# EAGLE board Eboard_Powerboard (EAGLE 9.2.2)
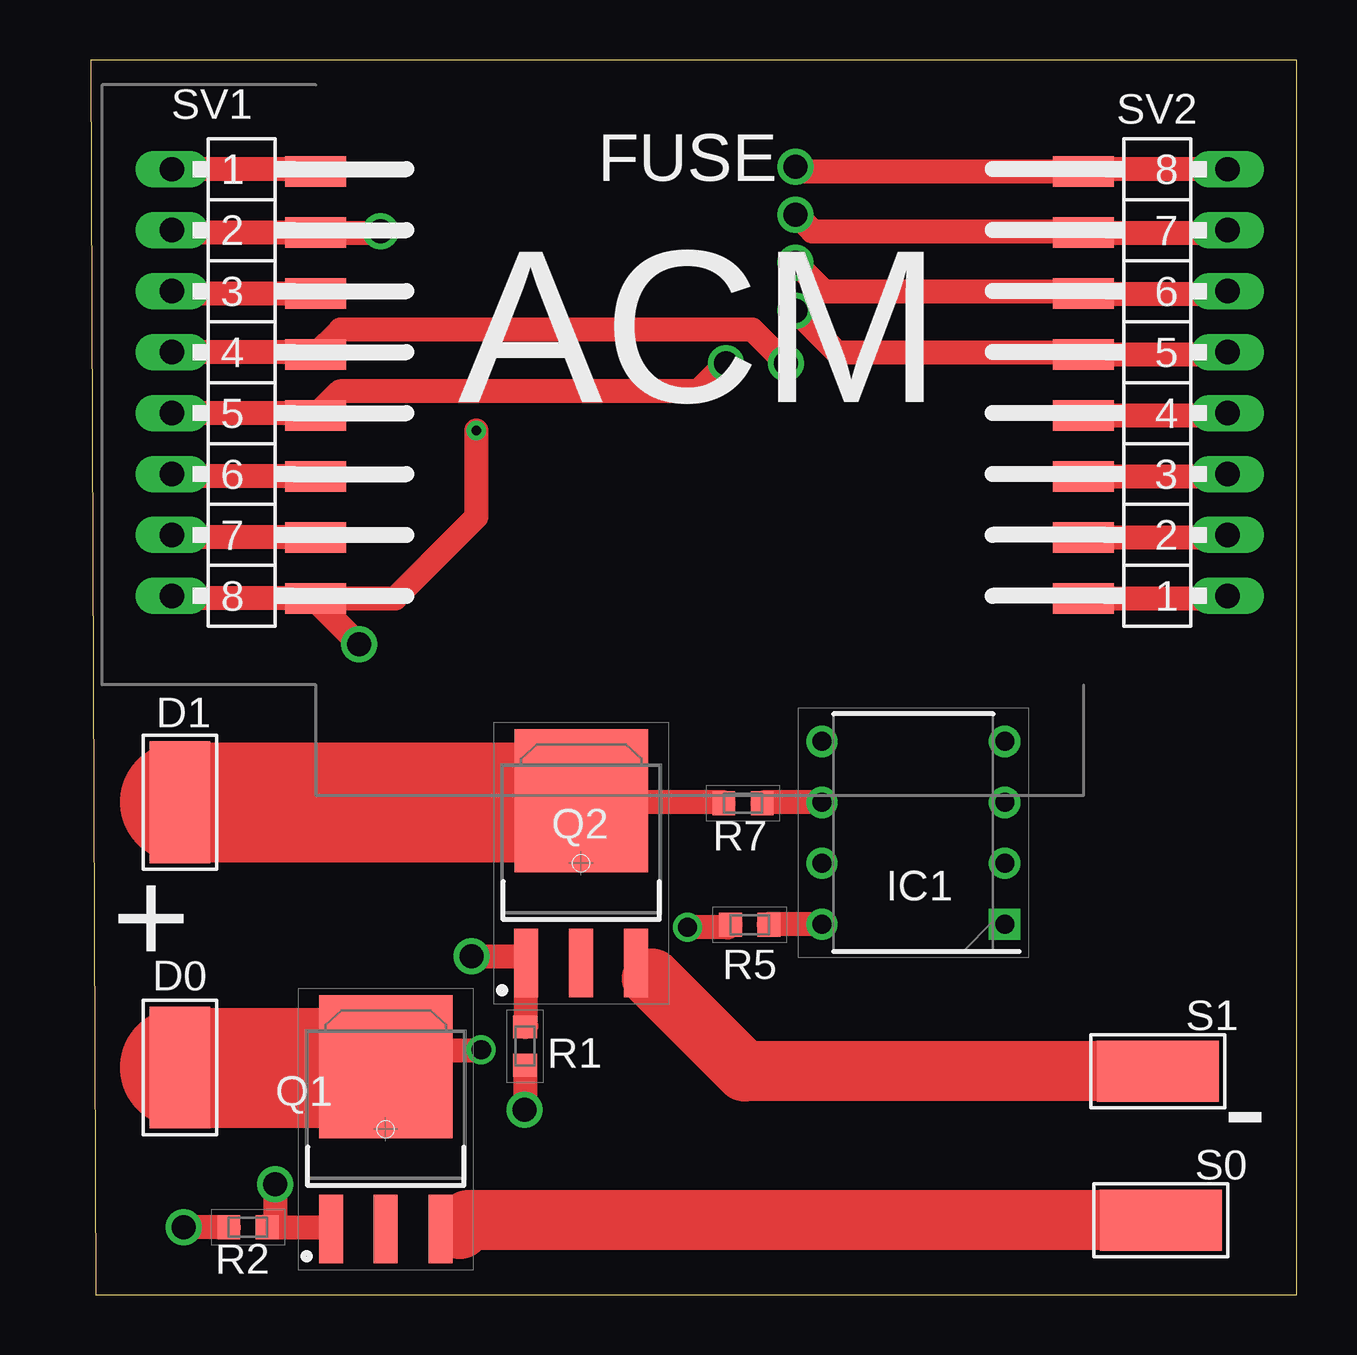
[diagram p0: board, top side]
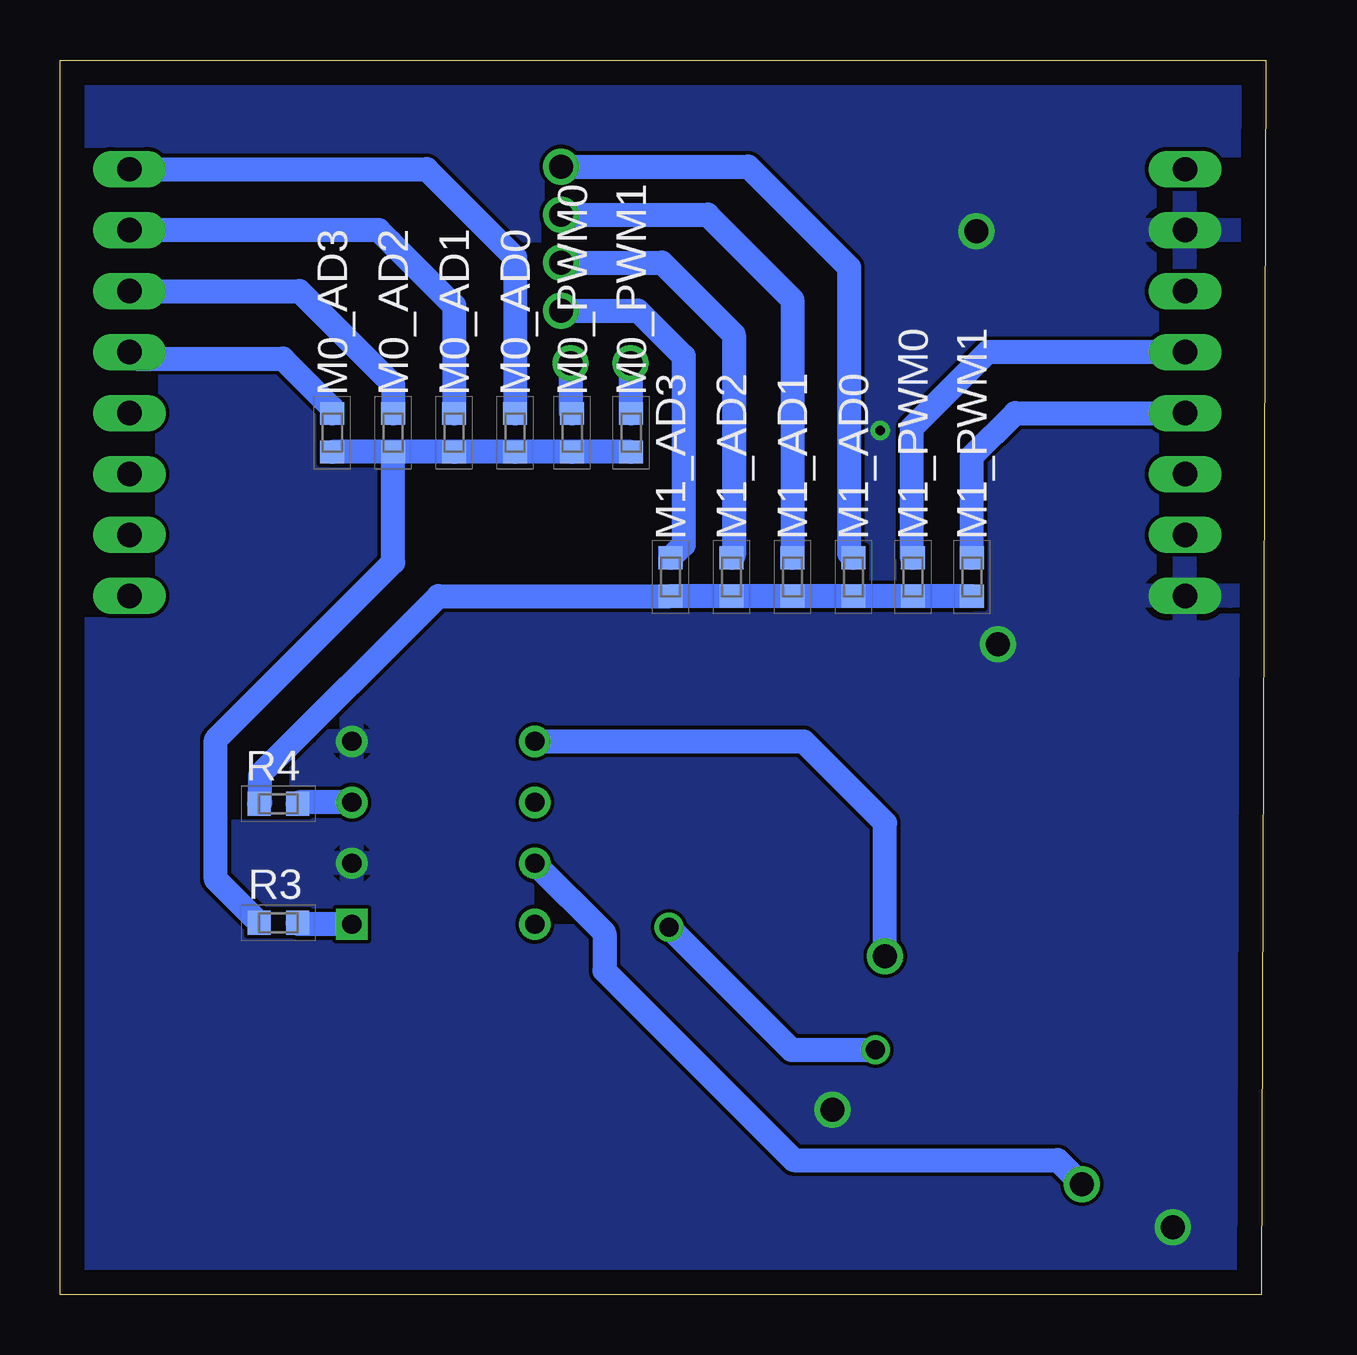
[diagram p1: board, bottom side, seen from below]

Size 50.26 x 51.44 mm. Coordinates in mm from the lower left corner, seen from the top.
Outline: 0.19,0 50.26,0 50.26,51.44 0,51.44 0.19,0
Copper layers (1*16): Top 0.035mm / dielectric 1.5mm / Bottom 0.035mm
Design rules "default": minimum track width 6mil, minimum drill 0.35mm, track to track 6mil, track to pad 6mil, pad to pad 6mil, via to via 6mil, smd to smd 6mil, copper to edge 40mil, drill to drill 6mil, minimum pad ring 10mil, minimum via ring 8mil, stop-mask expansion 4mil, vias tented up to drill 0mil, thermal gap 10mil

## Footprints (pad centres in the part's own frame; a part is rotated, then mirrored left to right if it is on the bottom)
5-2,5 = smd 2.54 x 5.08: 1 0,0
DIP762W60P254L966H485Q8N = drill 0.8 pad 1.2 square: 1 -3.81,3.81 | drill 0.8 pad 1.2: 2 -3.81,1.27; 3 -3.81,-1.27; 4 -3.81,-3.81; 5 3.81,-3.81; 6 3.81,-1.27; 7 3.81,1.27; 8 3.81,3.81
RESC1608X55N = smd 0.95 x 1: 1 -0.8,0; 2 0.8,0
TO229P990X238-4N = smd 2.85 x 1: 1 -4.15,2.29; 2 -4.15,0; 3 -4.15,-2.29 | smd 5.95 x 5.55: 4 2.6,0
MA08-1W = drill 1.016 long: 1 -8.89,0; 2 -6.35,0; 3 -3.81,0; 4 -1.27,0; 5 1.27,0; 6 3.81,0; 7 6.35,0; 8 8.89,0
ACM_CAS_FP = smd 2.54 x 1.27: 5V 0,16.31; 5V1 32,3.61; 12V 0,21.39; CANH 0,6.15; CANL 0,8.69; GND 0,18.85; GND30 0,3.61; I/O_AD0 32,21.39; I/O_AD1 32,18.85; I/O_AD2_SDA 32,16.31; I/O_AD3_SCL 32,13.77; MISO 32,11.23; MOSI 32,8.69; PWM0 0,13.77; PWM1_INT1 0,11.23; SCK 32,6.15

## Placement (x,y rotation side)
D0  [5-2,5]  3.71,9.46 0 top
D1  [5-2,5]  3.71,20.52 180 top
IC1  Optocoupler DIP  [DIP762W60P254L966H485Q8N]  34.28,19.24 180 top
M0_AD0  [RESC1608X55N]  31.29,35.91 90 bottom
M0_AD1  [RESC1608X55N]  33.83,35.91 90 bottom
M0_AD2  [RESC1608X55N]  36.37,35.91 90 bottom
M0_AD3  [RESC1608X55N]  38.91,35.91 90 bottom
M0_PWM0  [RESC1608X55N]  28.91,35.91 90 bottom
M0_PWM1  [RESC1608X55N]  26.45,35.91 90 bottom
M1_AD0  [RESC1608X55N]  17.19,29.9 90 bottom
M1_AD1  [RESC1608X55N]  19.73,29.9 90 bottom
M1_AD2  [RESC1608X55N]  22.27,29.9 90 bottom
M1_AD3  [RESC1608X55N]  24.81,29.9 90 bottom
M1_PWM0  [RESC1608X55N]  14.71,29.9 90 bottom
M1_PWM1  [RESC1608X55N]  12.25,29.9 90 bottom
Q1  [TO229P990X238-4N]  12.29,6.89 90 top
Q2  [TO229P990X238-4N]  20.44,17.97 90 top
R1  [RESC1608X55N]  18.1,10.35 270 top
R2  [RESC1608X55N]  6.55,2.8 180 top
R3  200 Ohm  [RESC1608X55N]  41.16,15.49 180 bottom
R4  200 Ohm  [RESC1608X55N]  41.16,20.45 180 bottom
R5  1K Ohm  [RESC1608X55N]  27.46,15.41 180 top
R7  1K Ohm  [RESC1608X55N]  27.18,20.47 180 top
S0  [5-2,5]  44.6,3.1 90 top
S1  [5-2,5]  44.47,9.31 90 top
SV1  [MA08-1W]  3.37,38 270 top
SV2  [MA08-1W]  47.37,38 90 top
U$1  ACM_CASTELLATED  [ACM_CAS_FP]  9.37,25.4 0 top

## Library data of the parts
D0 D1 S0 S1 = wirepad
IC1 = TLP350(F); DESCRIPTION: Toshiba TLP350(F) DC Input Optocoupler, Through Hole, 8-Pin PDIP; HEIGHT: 4.85mm; MANUFACTURER_NAME: Toshiba; MANUFACTURER_PART_NUMBER: TLP350(F); MOUSER_PART_NUMBER: 757-TLP350(F); MOUSER_PRICE-STOCK: https://www.mouser.com/Search/Refine.aspx?Keyword=757-TLP350%28F%29; RS_PART_NUMBER: 0186022P; RS_PRICE-STOCK: http://uk.rs-online.com/web/p/products/0186022P
M0_AD0 M0_AD1-M0_AD3 M0_PWM0 M0_PWM1 M1_AD0 M1_AD1-M1_AD3 M1_PWM0 M1_PWM1 R1-R5 R7 = ERA-3AEB2262V(0603 Resistor); DESCRIPTION: Thin Film Resistors - SMD 0603 22.6Kohm 0.1% 25ppm; HEIGHT: 0.55mm; MANUFACTURER_NAME: Panasonic; MANUFACTURER_PART_NUMBER: ERA-3AEB2262V; MOUSER_PART_NUMBER: 667-ERA-3AEB2262V; MOUSER_PRICE-STOCK: https://www.mouser.com/Search/Refine.aspx?Keyword=667-ERA-3AEB2262V
Q1 Q2 = NGD8201ANT4G_Mosfet; ALLIED_NUMBER: 70341208; ALLIED_PRICE-STOCK: http://www.alliedelec.com/on-semiconductor-ngd8201ant4g/70341208/; HEIGHT: 2.38mm; MANUFACTURER_NAME: ON Semiconductor; MANUFACTURER_PART_NUMBER: NGD8201ANT4G; MOUSER_PART_NUMBER: 7470901; MOUSER_PRICE-STOCK: http://uk.rs-online.com/web/p/products/7470901; RS_PART_NUMBER: 7470901; RS_PRICE-STOCK: http://uk.rs-online.com/web/p/products/7470901
SV1 SV2 = con-lstb; OC_FARNELL: unknown; OC_NEWARK: unknown
U$1 = ACM_Castellated

## Nets
AD0: M0_AD0.2 M1_AD0.2 SV2.8 U$1.I/O_AD0
AD1: M0_AD1.2 M1_AD1.2 SV2.7 U$1.I/O_AD1
AD2: M0_AD2.2 M1_AD2.2 SV2.6 U$1.I/O_AD2_SDA
AD3: M0_AD3.2 M1_AD3.2 SV2.5 U$1.I/O_AD3_SCL
DRAIN0: D0.1 Q1.4 R5.2
DRAIN1: D1.1 Q2.4 R7.2
GATE0: IC1.7 Q1.1 R2.1
GATE1: IC1.5 Q2.1 R1.1
GND: IC1.2 IC1.4 R1.2 R2.2 SV1.2 SV1.8 U$1.GND U$1.GND30
N$1: SV1.3 U$1.5V
N$2: IC1.1 R3.1
N$3: SV1.1 U$1.12V
N$4: SV1.6 U$1.CANL
N$5: SV1.7 U$1.CANH
N$6: IC1.3 R4.1
N$7: IC1.8 R5.1
N$9: SV2.4 U$1.MISO
N$10: SV2.3 U$1.MOSI
N$11: SV2.2 U$1.SCK
N$12: SV2.1 U$1.5V1
N$13: IC1.6 R7.1
N$15: M0_AD0.1 M0_AD1.1 M0_AD2.1 M0_AD3.1 M0_PWM0.1 M0_PWM1.1 R3.2
N$16: M1_AD0.1 M1_AD1.1 M1_AD2.1 M1_AD3.1 M1_PWM0.1 M1_PWM1.1 R4.2
PWM0: M0_PWM0.2 M1_PWM0.2 SV1.4 U$1.PWM0
PWM1: M0_PWM1.2 M1_PWM1.2 SV1.5 U$1.PWM1_INT1
SOURCE0: Q1.3 S0.1
SOURCE1: Q2.3 S1.1

## Tracks (layer width: path | path; a pad name or v marks a point on that pad's centre or on a via)
AD0  (via drill 1)
  Top 1: SV2.8 41.47,46.89 U$1.I/O_AD0 29.58,46.79 v29.37,47
  Bottom 1: SV2.8 34.97,46.89 31.29,43.21 M0_AD0.2 | v29.37,47 21.57,47 17.37,42.8 17.37,30.88 M1_AD0.2
AD1  (via drill 1)
  Top 1: v29.37,45 30.07,44.3 41.32,44.3 U$1.I/O_AD1 47.27,44.25 SV2.7
  Bottom 1: M0_AD1.2 33.83,41.21 36.5,43.88 36.97,44.35 SV2.7 | v29.37,45 23.27,45 19.73,41.46 M1_AD1.2
AD2  (via drill 1)
  Top 1: v29.37,43 30.56,41.81 41.27,41.81 U$1.I/O_AD2_SDA 47.27,41.71 SV2.6
  Bottom 1: SV2.6 40.28,41.81 36.37,37.9 M0_AD2.2 | v29.37,43 25.17,43 22.17,40 22.17,30.8 M1_AD2.2
AD3  (via drill 1)
  Top 1: v29.37,41 31.1,39.27 41.27,39.27 U$1.I/O_AD3_SCL 47.27,39.17 SV2.5
  Bottom 1: SV2.5 47.1,39 40.97,39 38.91,36.94 M0_AD3.2 | v29.37,41 26.17,41 24.27,39.1 24.27,31.24 M1_AD3.2
DRAIN0  (via drill 0.8)
  Top 1: R5.2 26.55,15.3 v24.87,15.3 | v16.27,10.2 16.23,10.16 12.96,10.16 Q1.4
  Top 5: D0.1 12.26,9.46 Q1.4
  Bottom 1: v24.87,15.3 19.77,10.2 v16.27,10.2
DRAIN1
  Top 1: R7.2 26.33,20.52 20.39,20.52
  Top 5: D1.1 20.39,20.52 Q2.4
GATE0  (via drill 1)
  Top 0.4: 9.94,2.8 Q1.1
  Top 1: 9.94,2.8 R2.1 7.67,3.12 v7.67,4.6
  Bottom 1: v7.67,4.6 8.67,5.6 19.67,5.6 27.57,13.5 27.57,15.07 IC1.7
GATE1  (via drill 1)
  Top 1: R1.1 18.15,11.2 Q2.1 17.87,14.1 v15.87,14.1
  Bottom 1: IC1.5 19.27,23.05 15.87,19.65 v15.87,14.1
GND  (via drill 0.4, 1)
  Top 1: R2.2 v3.87,2.8 | R1.2 18.1,7.73 v18.07,7.7 | SV1.2 3.47,44.25 U$1.GND 12.02,44.25 v12.07,44.3 | U$1.GND30 3.47,29.01 SV1.8 | U$1.GND30 9.37,28.9 v11.17,27.1 | U$1.GND30 12.68,29.01 16.07,32.4 v16.07,36
  pour Bottom: 0.37,51 50.37,51 50.37,0 0.37,0
N$1
  Top 1: U$1.5V 3.47,41.71 SV1.3
N$2
  Bottom 1: IC1.1 40.3,15.43 R3.1
N$3
  Top 1: U$1.12V 9.27,46.89 SV1.1
N$4
  Top 1: U$1.CANL 3.47,34.09 SV1.6
N$5
  Top 1: U$1.CANH 3.47,31.55 SV1.7
N$6
  Bottom 1: IC1.3 40.3,20.51 R4.1
N$7
  Top 1: IC1.8 28.28,15.43 R5.1
N$9
  Top 1: U$1.MISO 47.27,36.63 SV2.4
N$10
  Top 1: U$1.MOSI 47.27,34.09 SV2.3
N$11
  Top 1: U$1.SCK 47.27,31.55 SV2.2
N$12
  Top 1: U$1.5V1 47.27,29.01 SV2.1
N$13
  Top 1: IC1.6 28.02,20.51 R7.1
N$15
  Bottom 1: M0_PWM1.1 M0_PWM0.1 M0_AD0.1 M0_AD1.1 M0_AD2.1 | M0_AD2.1 M0_AD3.1 | R3.2 43.77,17.3 43.77,23.11 36.37,30.51 M0_AD2.1
N$16
  Bottom 1: M1_PWM1.1 M1_PWM0.1 M1_AD0.1 M1_AD1.1 M1_AD2.1 M1_AD3.1 34.49,29.1 41.91,21.68 41.91,20.5 R4.2
PWM0  (via drill 1)
  Top 1: v28.97,38.8 27.57,40.2 10.4,40.2 U$1.PWM0 9.27,39.27 SV1.4
  Bottom 1: v28.97,38.8 28.97,36.77 M0_PWM0.2 | SV1.4 11.6,39.27 14.77,36.1 14.77,30.76 M1_PWM0.2
PWM1  (via drill 1)
  Top 1: v26.47,38.8 25.3,37.63 10.37,37.63 U$1.PWM1_INT1 9.27,36.73 SV1.5
  Bottom 1: v26.47,38.8 26.47,36.73 M0_PWM1.2 | M1_PWM1.2 12.25,34.92 10.44,36.73 SV1.5
SOURCE0
  Top 1: Q1.3 15.37,2.74 16.01,2.74
  Top 2.5: 15.37,2.74 15.53,2.9 15.73,3.1 S0.1
SOURCE1
  Top 1: 23.37,13.18 Q2.3
  Top 2.5: S1.1 27.25,9.3 23.37,13.18

## Text on the board
tNames: + | -